# Altium PCB Back.PcbDoc
Units mm, origin at the board's own origin, x right, y up, seen from the top; angles counter-clockwise.
Board outline 54 x 71.15 mm, 2 copper layers (Top Layer, Bottom Layer); 44 components, 19 nets, 120 pads, 11 vias.
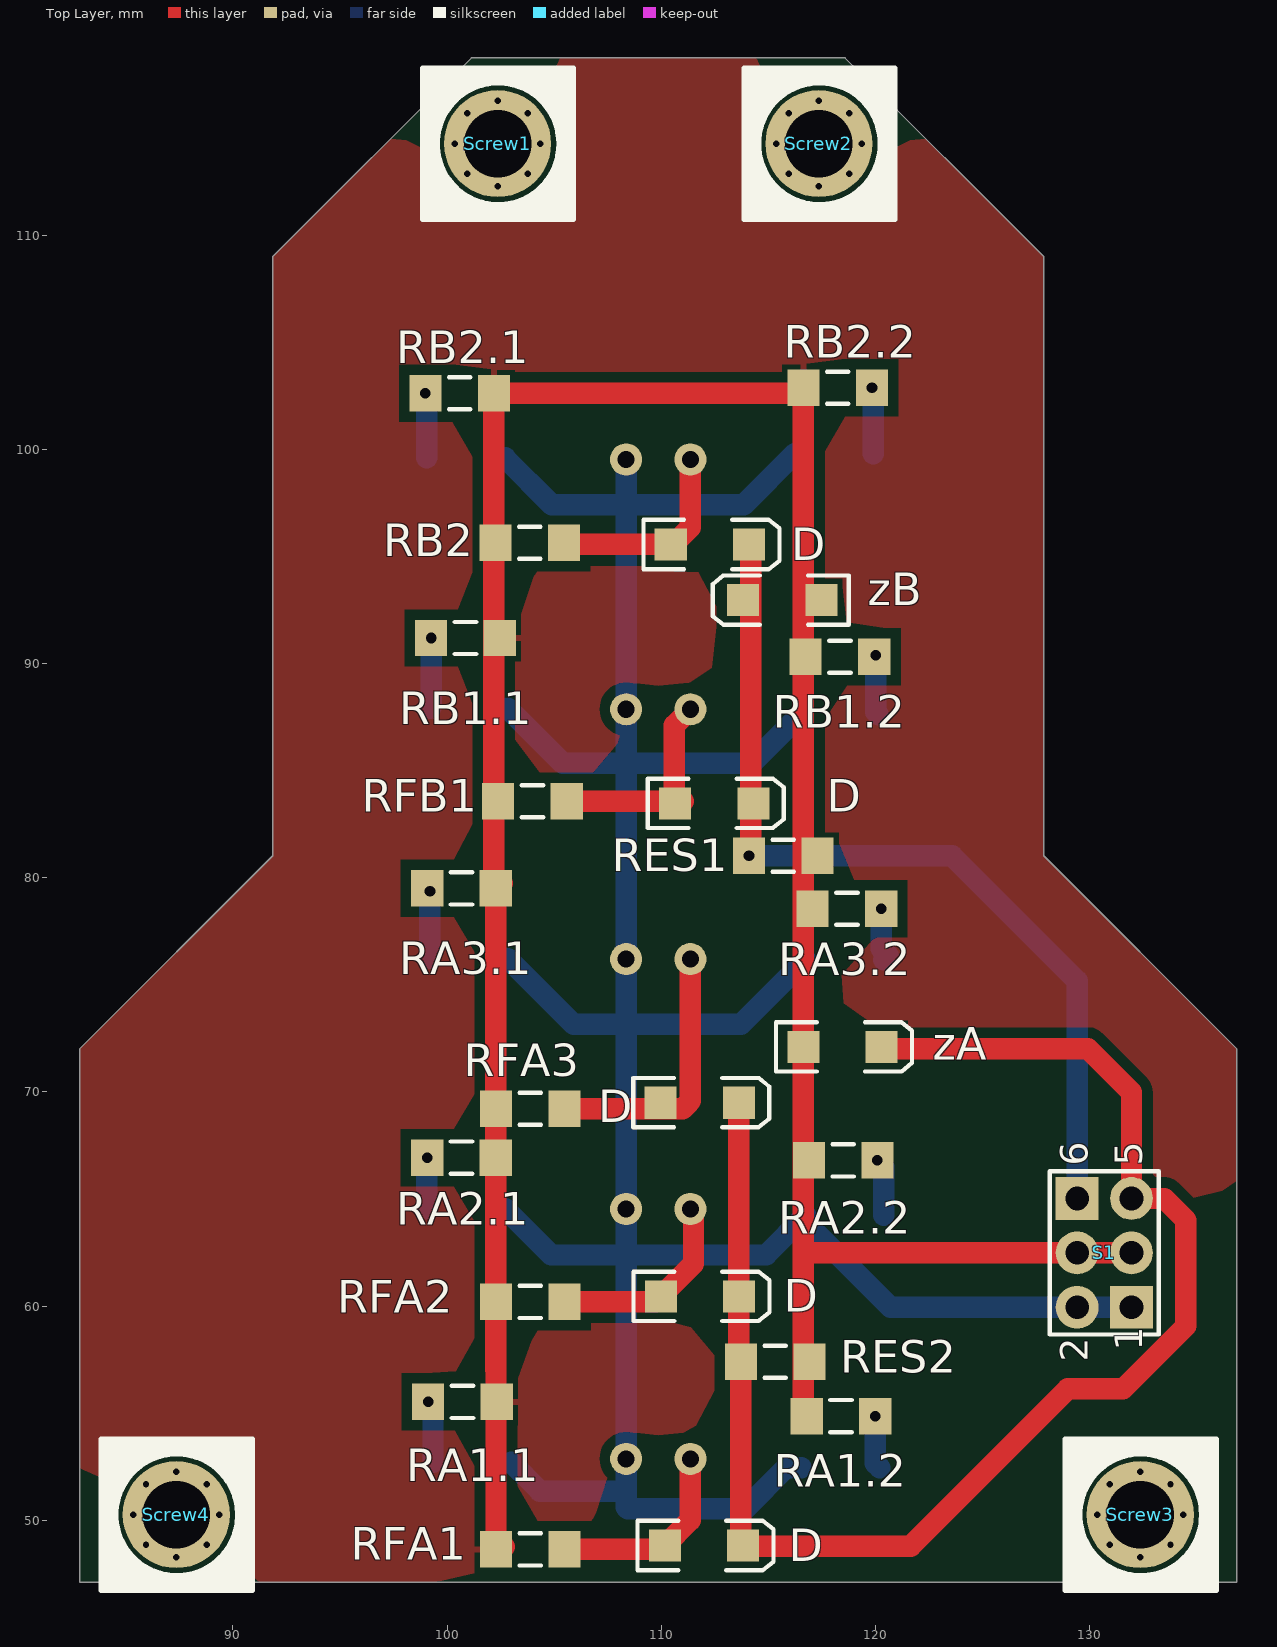
[diagram p0: Top Layer view]
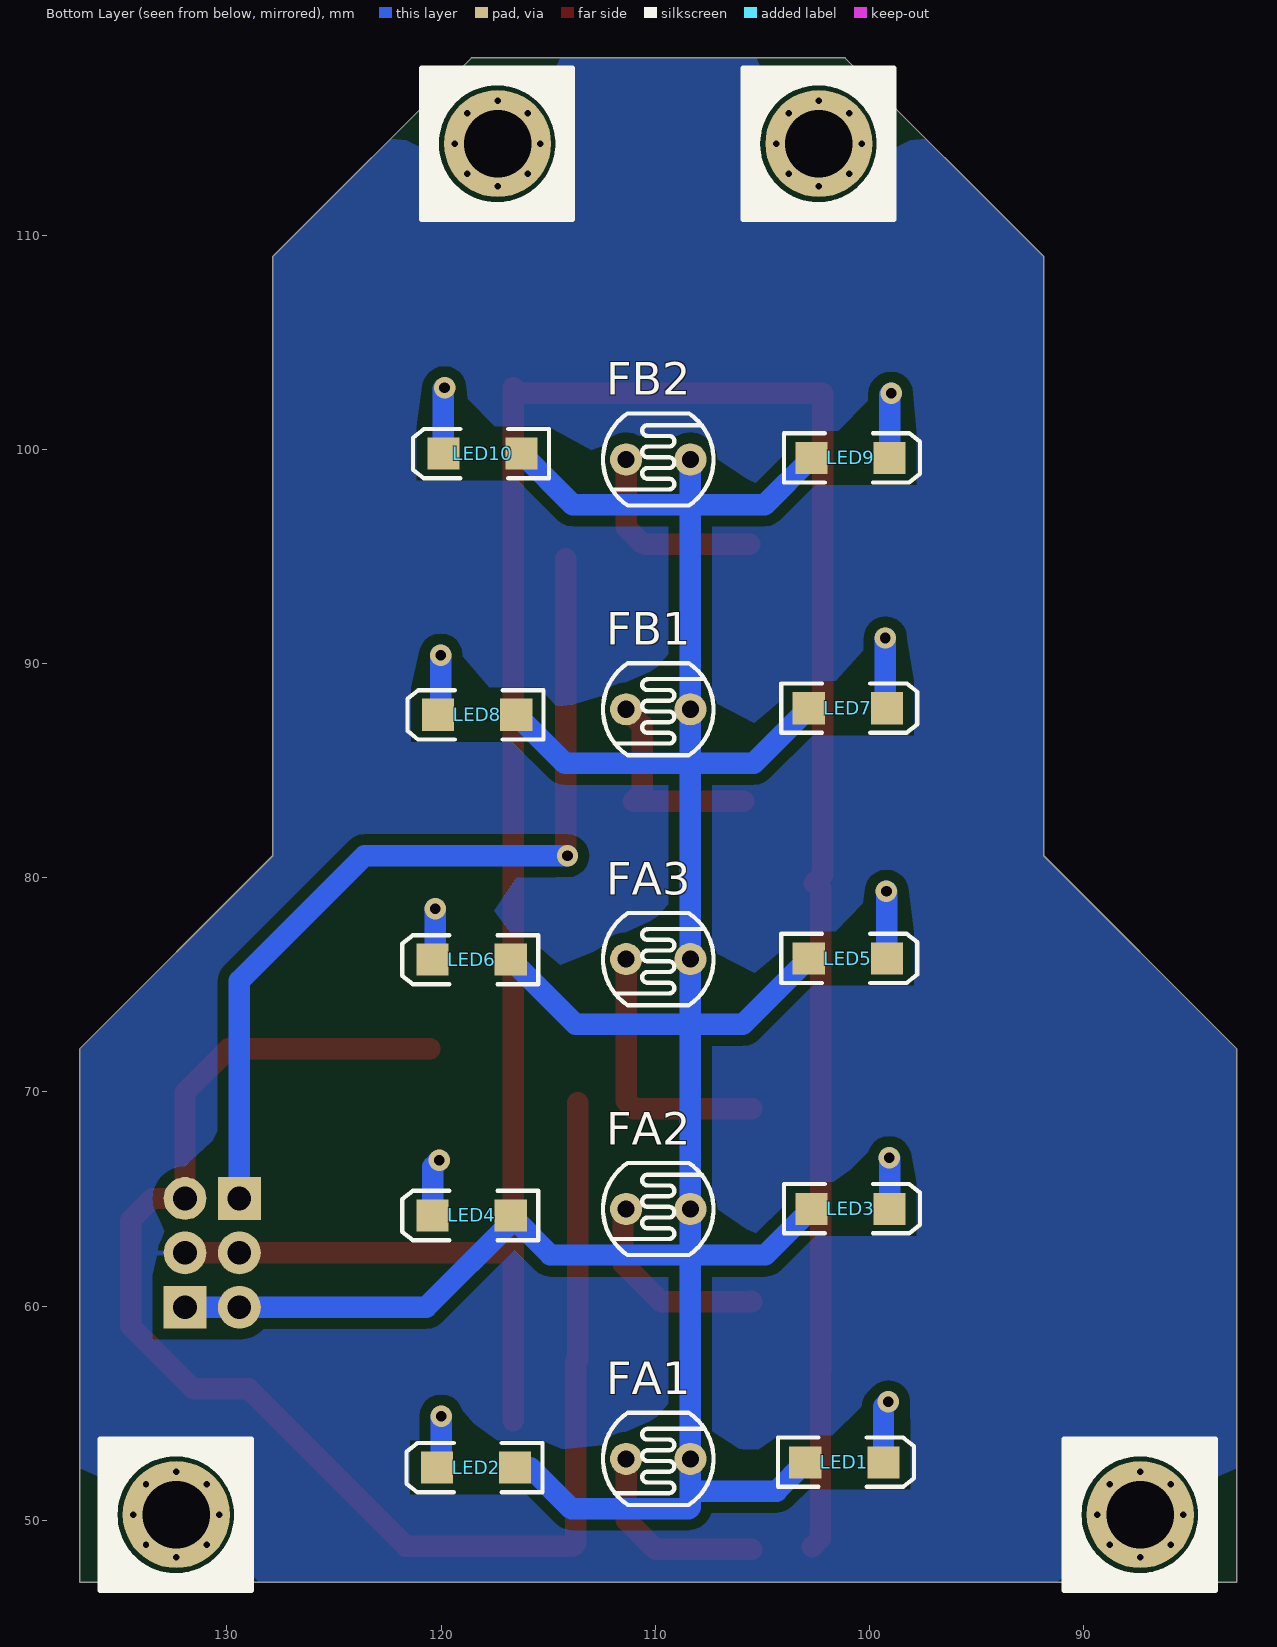
[diagram p1: Bottom Layer view, seen from below]
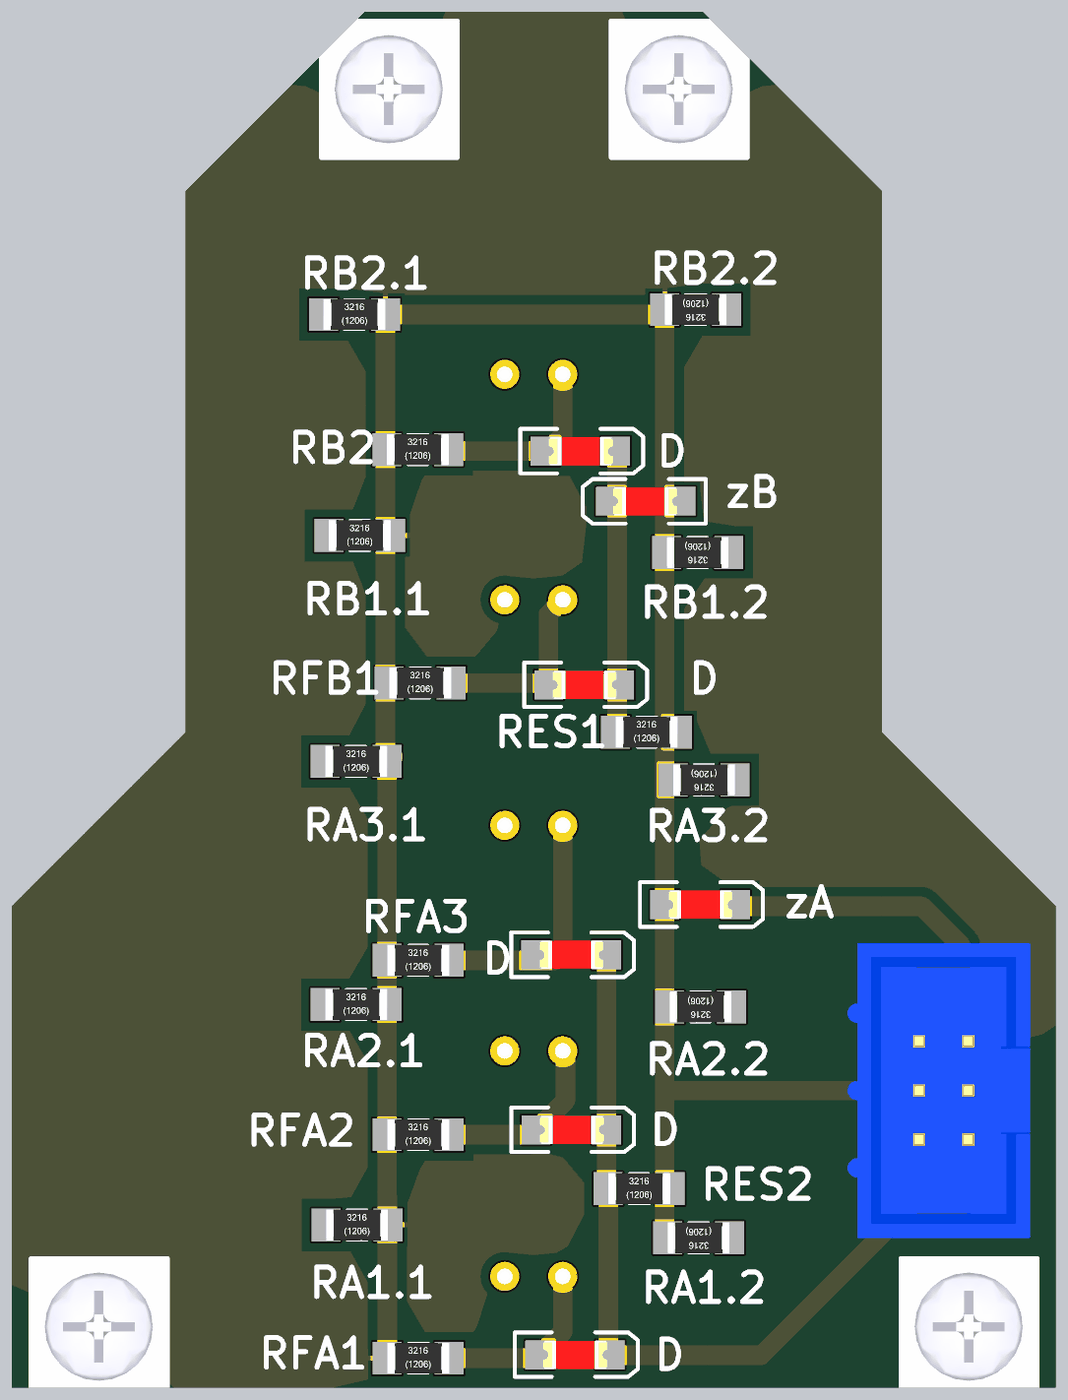
[diagram p2: 3D render of the assembled board from above, using the file's embedded part models]
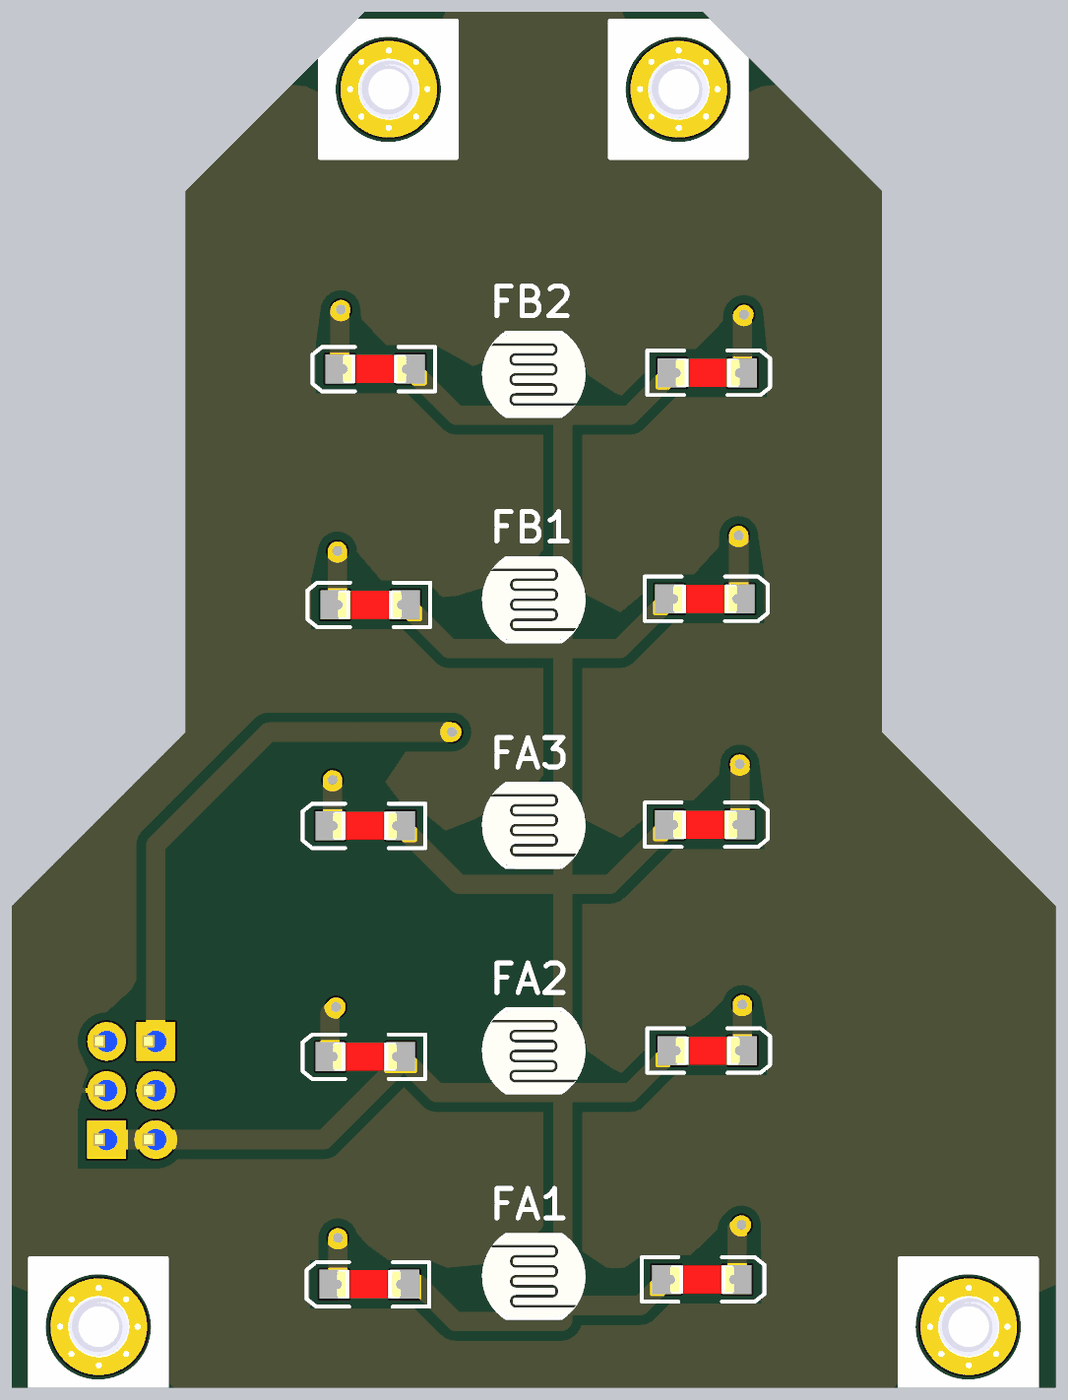
[diagram p3: 3D render of the assembled board from below, using the file's embedded part models]

## Layer stack, top to bottom
Top Solder: solder mask 0.0102, Solder Resist, Dk 3.5
Top Layer: signal copper 0.0356
Dielectric 1: dielectric 0.32, FR-4, Dk 4.8
Bottom Layer: signal copper 0.0356
Bottom Solder: solder mask 0.0102, Solder Resist, Dk 3.5

## Board outline
82.861,47.115 82.861,72.021 91.861,81.021 91.861,108.992 101.138,118.269 109.861,118.269 118.584,118.269 127.861,108.992 127.861,81.021 136.861,72.021 136.861,47.115

## Design rules (kind name [scope] priority, off if disabled: settings)
Clearance [All] p1: gap=0.5 ignorepadtopadclearanceinfootprint=FALSE
PolygonConnect [All] p1: connectstyle=Relief reliefconductorwidth=0.254 reliefentries=4 polygonreliefangle="90 Angle" airgapwidth=0.254
RoutingVias [All] p1: holewidth=0.711 width=1.27 viastyle="Through Hole" minholewidth=0.711 minwidth=1.27 maxholewidth=0.711 maxwidth=1.27
SolderMaskExpansion [All] p1: expansion=0.102
Width [All] p1: maxlimit=1 minlimit=1 preferedwidth=1
30 further rules are at their usual default settings.

## Components (designator, comment, footprint, x,y, rotation, side; value= is the part's Value field where it differs from the comment)
D "SMD" "LED SMD" 112.572,95.521 r0 top (schematic designator LEDB2)
D "SMD" "LED SMD" 112.776,83.439 r0 top (schematic designator LEDB1)
D "SMD" "LED SMD" 112.097,69.469 r0 top (schematic designator LEDA3)
D "SMD" "LED SMD" 112.107,60.427 r0 top (schematic designator LEDA2)
D "SMD" "LED SMD" 112.293,48.793 r0 top (schematic designator LEDA1)
FA1 "Photo Cell" PhotoCell. 109.861,52.869 r0 bottom
FA2 "Photo Cell" PhotoCell. 109.861,64.532 r180 bottom
FA3 "Photo Cell" PhotoCell. 109.861,76.196 r0 bottom
FB1 "Photo Cell" PhotoCell. 109.861,87.859 r0 bottom
FB2 "Photo Cell" PhotoCell. 109.861,99.522 r180 bottom
LED1 "SMD" "LED SMD" 100.872,52.68 r180 bottom
LED2 "SMD" "LED SMD" 118.668,52.487 r0 bottom
LED3 "SMD" "LED SMD" 100.584,64.516 r180 bottom
LED4 "SMD" "LED SMD" 118.872,64.262 r0 bottom
LED5 "SMD" "LED SMD" 100.711,76.2 r180 bottom
LED6 "SMD" "LED SMD" 118.872,76.2 r0 bottom
LED7 "SMD" "LED SMD" 100.711,87.884 r180 bottom
LED8 "SMD" "LED SMD" 118.618,87.63 r0 bottom
LED9 "SMD" "LED SMD" 100.584,99.568 r180 bottom
LED10 "SMD" "LED SMD" 118.364,99.822 r0 bottom
RA1.1 "SMD" "Resistor SMD 1206" 100.719,55.528 r0 top (schematic designator RESLA1.1)
RA1.2 "SMD" "Resistor SMD 1206" 118.393,54.864 r180 top (schematic designator RESLA1.2)
RA2.1 "SMD" "Resistor SMD 1206" 100.676,66.929 r0 top (schematic designator RESLA2.1)
RA2.2 "SMD" "Resistor SMD 1206" 118.491,66.802 r180 top (schematic designator RESLA2.2)
RA3.1 "SMD" "Resistor SMD 1206" 100.676,79.502 r0 top (schematic designator RESLA3.1)
RA3.2 "SMD" "Resistor SMD 1206" 118.668,78.552 r180 top (schematic designator RESLA3.2)
RB1.1 "SMD" "Resistor SMD 1206" 100.859,91.186 r0 top (schematic designator RESLB1.1)
RB1.2 "SMD" "Resistor SMD 1206" 118.343,90.311 r180 top (schematic designator RESLB1.2)
RB2 "SMD" "Resistor SMD 1206" 103.861,95.631 r0 top (schematic designator RESFB2)
RB2.1 "SMD" "Resistor SMD 1206" 100.588,102.616 r0 top (schematic designator RESLB2.1)
RB2.2 "SMD" "Resistor SMD 1206" 118.237,102.87 r180 top (schematic designator RESLB2.2)
RES1 "SMD" "Resistor SMD 1206" 115.697,81.021 r0 top
RES2 "SMD" "Resistor SMD 1206" 115.316,57.404 r0 top
RFA1 "SMD" "Resistor SMD 1206" 103.886,48.641 r0 top (schematic designator RESFA1)
RFA2 "SMD" "Resistor SMD 1206" 103.886,60.198 r0 top (schematic designator RESFA2)
RFA3 "SMD" "Resistor SMD 1206" 103.886,69.215 r0 top (schematic designator RESFA3)
RFB1 "SMD" "Resistor SMD 1206" 103.988,83.566 r0 top (schematic designator RESFB1)
S1 "IDC 2X3" "IDC 2X3" 130.683,62.484 r90 top
Screw1 "Screw" Screw 102.361,114.269 r0 top locked
Screw2 "Screw" Screw 117.361,114.269 r0 top locked
Screw3 "Screw" Screw 132.361,50.269 r0 top locked
Screw4 "Screw" Screw 87.361,50.269 r0 top
zA "zener" "LED SMD" 118.765,72.067 r0 top (schematic designator zenerA)
zB "zener" "LED SMD" 115.35,92.989 r180 top (schematic designator zenerB)

## Footprints (in the part's own frame and the unit in brackets; to place one, negate y for a bottom-side part, rotate by r counter-clockwise, add the part's x,y. Pads: shape width x height; smd on the part's side, far side on the other; paste and mask are expansions set on the pad)
"IDC 2X3" [mm]
  rect 2x2 hole 1.1: 1(-2.54,-1.27) 6(2.54,1.27)
  round 2 hole 1.1: 2(-2.54,1.27) 3(0,-1.27) 4(0,1.27) 5(2.54,-1.27)
  silkscreen extent -3.81,-2.54 3.81,2.54, body extent -7.62,-4.86 7.62,4.59, height 9.1
"LED SMD" [mm]
  rect 1.5x1.5 smd: 1(-2.125,0.025) 2(1.525,0.025)
  silkscreen extent -3.4,-1.12 2.95,1.18, body extent -1.92,-0.7 1.38,0.75, height 1.36
PhotoCell. [mm]
  round 1.5 hole 0.8: 1(-1.5,0) 2(1.5,0)
  silkscreen extent -2.58,-2.15 2.58,2.15, body extent -2.6,-2.16 2.61,2.14, height 2.74
"Resistor SMD 1206" [mm]
  rect 1.5x1.7 smd: 1(-1.6,0) 2(1.6,0)
  silkscreen extent -0.5,-0.75 0.5,0.75, body extent -1.6,-0.8 1.6,0.8, height 0.55
Screw [mm]
  round 0.6 hole 0.3: S(-2,0) S(-1.414,-1.414) S(-1.414,1.414) S(0,-2) S(0,2) S(1.414,-1.414) S(1.414,1.414) S(2,0)
  round 5 hole 3.15 mask+0.1: S(0,0)
  silkscreen extent -3.49,-3.53 3.56,3.52, body extent -2.8,-2.8 2.8,2.8, height 3.88

## Part data
D D D D D LED1 LED2 LED3 LED4 LED5 LED6 LED7 LED8 LED9 LED10: library part "LED SMD"
FA1 FA2 FA3 FB1 FB2: library part "Photo Cell..", LatestRevisionDate=17-Jul-2002, LatestRevisionNote="Re-released for DXP Platform.", Publisher="Altium Limited"
RA1.1 RA1.2 RA2.1 RA2.2 RA3.1 RA3.2 RB1.1 RB1.2 RB2 RB2.1 RB2.2 RES1 RES2 RFA1 RFA2 RFA3 RFB1: library part "Res SMD"
zA zB: library part SMDZenerDiode
Screw1 Screw2 Screw3 Screw4: LatestRevisionDate=17-Jul-2002, LatestRevisionNote="Re-released for DXP Platform.", Publisher="Altium Limited"

## Via types
v1: diameter 1, hole 0.5, Top Layer to Bottom Layer, 11 vias

## Nets (pads, with @x,y where several pads share a name; then routed paths per layer and width w, separated by ;. In a path a pad name is that pad's centre, name@x,y a point inside that pad or via, vN(x,y) a via of type N, cw(c..) or ccw(c..) an arc to the next point about the centre after c; other vN are vias at no path point)
GND: RA1.1.2 RA1.2.2 RA2.1.2 RA2.2.2 RA3.1.2 RA3.2.2 RB1.1.2 RB1.2.2 RB2.1 RB2.1.2 RB2.2.2 RES1.2 RES2.2 RFA1.1 RFA2.1 RFA3.1 RFB1.1 S1.3 S1.4 zA.1 zB.1 | length 131.7
  Top Layer w1: RA3.1.2 102.276,63.5 102.276,57.033 102.286,57.023 102.286,49.147 RFA1.1@102.665,48.768 ; RA3.1.2@102.586,79.742 102.188,80.14 102.188,91.186 RB2.1.2 116.383,102.616 RB2.2.2 116.637,90.551 116.637,78.867 116.637,69.875 RA1.2.2@116.637,54.653 ; 116.929,62.484 S1.4 S1.3
NetFA1_2: D.1@110.168,48.818 FA1.2 RFA1.2 | length 9.3
  Top Layer w1: RFA1.2 109.991,48.641 110.168,48.818 111.361,50.011 FA1.2
NetFA2_1: D.1@109.982,60.452 FA2.1 RFA2.2 | length 9.4
  Top Layer w1: RFA2.2@105.511,60.223 RFA2.2 109.728,60.198 109.982,60.452 111.506,61.976 111.506,64.388 FA2.1
NetFA3_2: D.1@109.972,69.494 FA3.2 RFA3.2 | length 12.6
  Top Layer w1: RFA3.2 110.999,69.215 111.278,69.494 111.361,69.577 FA3.2
NetFB1_2: D.1@110.651,83.464 FB1.2 RFB1.2 | length 9.9
  Top Layer w1: RFB1.2@105.865,83.566 111.03,83.566 110.617,83.979 110.617,87.115 FB1.2
NetFB2_1: D.1@110.447,95.546 FB2.1 RB2.2 | length 9
  Top Layer w1: RB2.2@105.588,95.557 D.1@110.447,95.557 ; D.1@110.647,95.631 111.361,96.345 FB2.1
NetLED1_2: LED1.2 RA1.1.1 | length 2.9
  Bottom Layer w1: v1(99.119,55.528) 99.347,55.3 LED1.2
NetLED2_2: LED2.2 RA1.2.1 | length 2.5
  Bottom Layer w1: v1(119.993,54.864) 119.993,52.662 LED2.2
NetLED3_2: LED3.2 RA2.1.1 | length 2.4
  Bottom Layer w1: LED3.2 99.059,66.912 v1(99.076,66.929)
NetLED4_2: LED4.2 RA2.2.1 | length 2.7
  Bottom Layer w1: v1(120.091,66.802) 120.397,66.496 LED4.2
NetLED5_2: LED5.2 RA3.1.1 | length 3.2
  Bottom Layer w1: LED5.2 99.186,79.344 v1(99.209,79.367)
NetLED6_2: LED6.2 RA3.2.1 | length 2.6
  Bottom Layer w1: v1(120.268,78.552) 120.268,76.688 120.589,76.367 LED6.2
NetLED7_2: LED7.2 RB1.1.1 | length 3.3
  Bottom Layer w1: LED7.2 99.259,87.982 v1(99.259,91.186)
NetLED8_2: LED8.2 RB1.2.1 | length 2.8
  Bottom Layer w1: v1(120.015,90.386) 120.015,87.733 LED8.2
NetLED9_2: LED9.2 RB2.1.1 | length 3.1
  Bottom Layer w1: v1(98.988,102.616) 99.059,102.545 LED9.2
NetLED10_2: LED10.2 RB2.2.1 | length 3.1
  Bottom Layer w1: v1(119.837,102.87) 119.889,102.818 LED10.2
OUTLA: D.2@113.622,69.494 D.2@113.632,60.452 D.2@113.818,48.818 RES2.1 S1.5 zA.2 | length 70.8
  Top Layer w1: D.2@113.622,69.494 113.622,57.498 RES2.1 113.716,48.92 113.818,48.818 113.843,48.793 121.639,48.793 128.98,56.134 131.557,56.134 134.493,59.07 134.493,64.008 133.477,65.024 S1.5 131.953,69.977 129.921,72.009 zA.2@120.516,72.009
OUTLB: D.2@114.097,95.546 D.2@114.301,83.464 RES1.1 S1.6 zB.2 | length 41.8
  Top Layer w1: v1(114.097,81.021) 114.174,81.098 114.174,83.464 D.2@114.174,94.894
  Bottom Layer w1: v1(114.097,81.021) 123.576,81.021 129.413,75.184 S1.6
VCC: FA1.1 FA2.2 FA3.1 FB1.1 FB2.2 LED1.1 LED2.1 LED3.1 LED4.1 LED5.1 LED6.1 LED7.1 LED8.1 LED9.1 LED10.1 S1.1 S1.2 | length 144.1
  Bottom Layer w1: LED3.1 104.866,62.384 108.361,62.384 ; LED9.1 104.893,97.409 108.361,97.409 ; LED5.1 105.909,73.152 108.361,73.152 ; LED7.1 105.401,85.344 108.361,85.344 ; LED1.1 104.337,51.365 108.331,51.365 108.361,51.395 ; FB2.2 108.361,97.409 ; LED10.1 113.851,97.409 108.361,97.409 ; LED8.1 114.232,85.344 108.361,85.344 ; LED2.1 115.835,52.462 113.919,50.546 108.431,50.546 108.361,50.616 108.361,51.395 ; LED4.1@116.637,64.008 120.701,59.944 S1.2 S1.1 ; LED4.1 114.894,62.384 108.361,62.384 ; LED6.1 113.724,73.152 108.361,73.152 ; 108.361,51.395 FA1.1 108.361,62.384 ; 108.361,62.384 FA2.2 108.361,73.152 ; 108.361,73.152 FA3.1 108.361,85.344 ; 108.361,85.344 FB1.1 108.361,97.409
pads on no net: Screw1.S Screw2.S Screw3.S Screw4.S

## Polygon pours and split planes (outlines as drawn)
GND on Bottom Layer "GND_L02_P000" (solid, remove dead copper, pour order 0): 82.861,47.115 82.861,72.021 91.861,81.021 91.861,108.992 101.138,118.269 109.861,118.269 118.584,118.269 127.861,108.992 127.861,81.021 136.861,72.021 136.861,47.115
GND on Top Layer "GND_L01_P001" (solid, remove dead copper, pour order 1): 82.861,47.115 82.861,72.021 91.861,81.021 91.861,108.992 101.138,118.269 109.861,118.269 118.584,118.269 127.861,108.992 127.861,81.021 136.861,72.021 136.861,47.115

## Silkscreen, mask and mechanical layers (free items; w line width, h text height)
Mechanical 1:
  circle w0.013: c117.361,114.269 r1.5
  circle w0.013: c87.361,50.269 r1.5
  circle w0.013: c102.361,114.269 r1.5
  circle w0.013: c132.361,50.269 r1.5
  lines w0.013: 82.861,47.115 82.861,72.021 91.861,81.021 91.861,108.992 101.138,118.269 109.861,118.269 118.584,118.269 127.861,108.992 127.861,81.067 136.861,72.067 136.861,47.115 109.861,47.115 82.861,47.115
Mechanical 2:
  circle w0.013: c109.861,52.869 r2.6
  circle w0.013: c109.861,64.532 r2.6
  circle w0.013: c109.861,76.196 r2.6
  circle w0.013: c109.861,87.859 r2.6
  circle w0.013: c109.861,99.522 r2.6
  lines w1: 97.361,48.269 97.361,108.269 104.265,108.269 104.265,48.269 ; 115.062,48.269 122.682,48.269 122.682,108.269 115.062,108.269 115.062,48.269

## Text inside footprints (layer, text, board x,y; h text height)
S1: Top Overlay "1" at 132.461,57.912 h1.27 r90; Top Overlay "2" at 129.921,57.404 h1.27 r90; Top Overlay "5" at 132.461,66.548 h1.27 r90; Top Overlay "6" at 129.921,66.548 h1.27 r90